# Altium PCB PCB1.PcbDoc (part 1 of 2)
Units mil, origin at the board's own origin, x right, y up, seen from the top; angles counter-clockwise.
Board outline 5350 x 4029.88 mil, 2 copper layers (Top Layer, Bottom Layer); 136 components, 72 nets, 358 pads, 1189 vias.
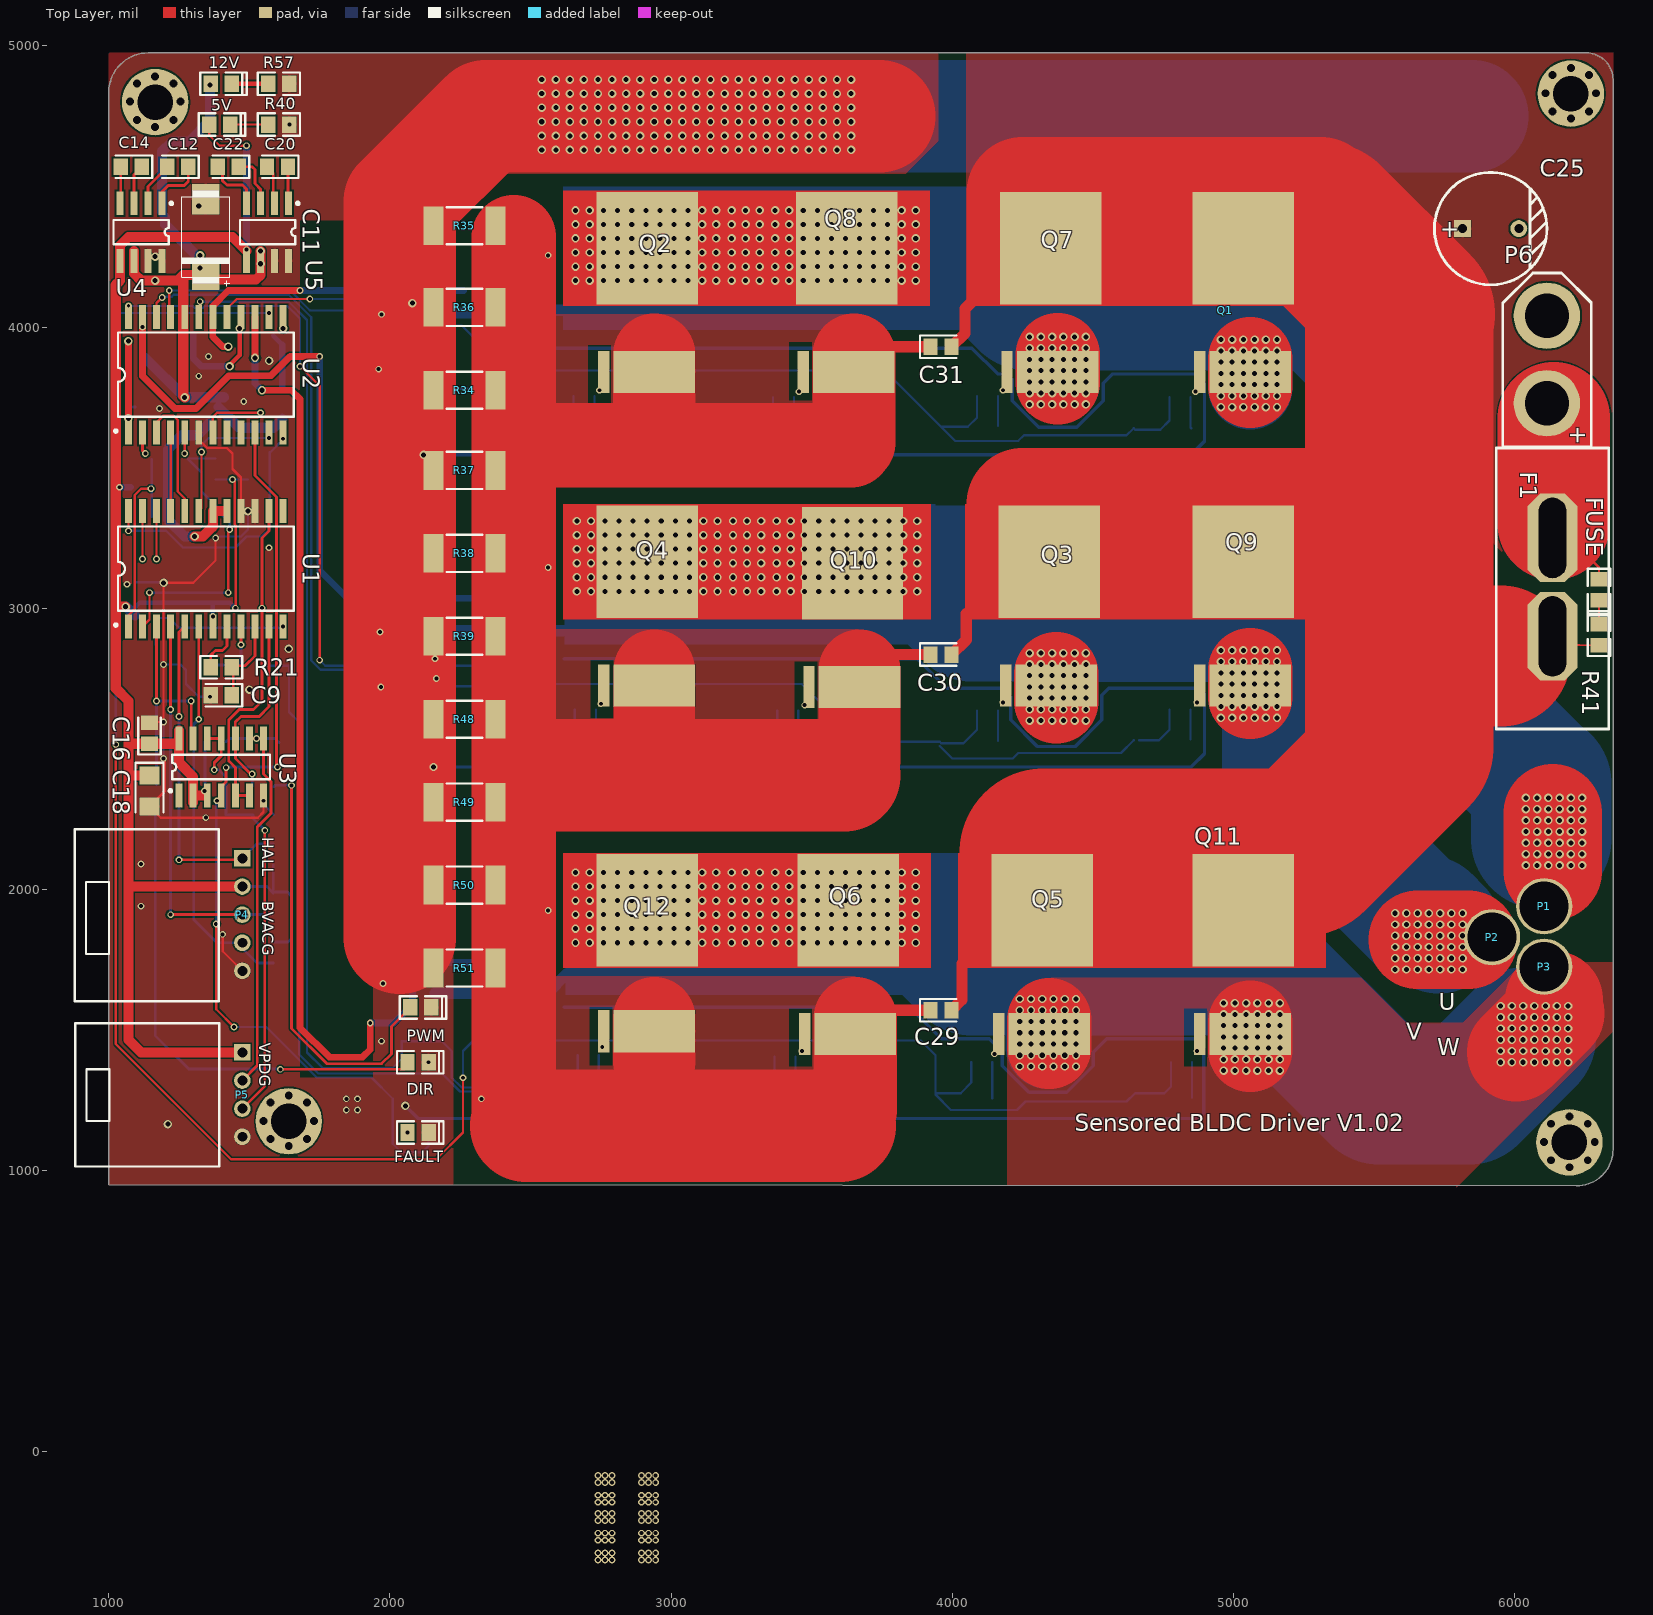
[diagram p0: Top Layer view]
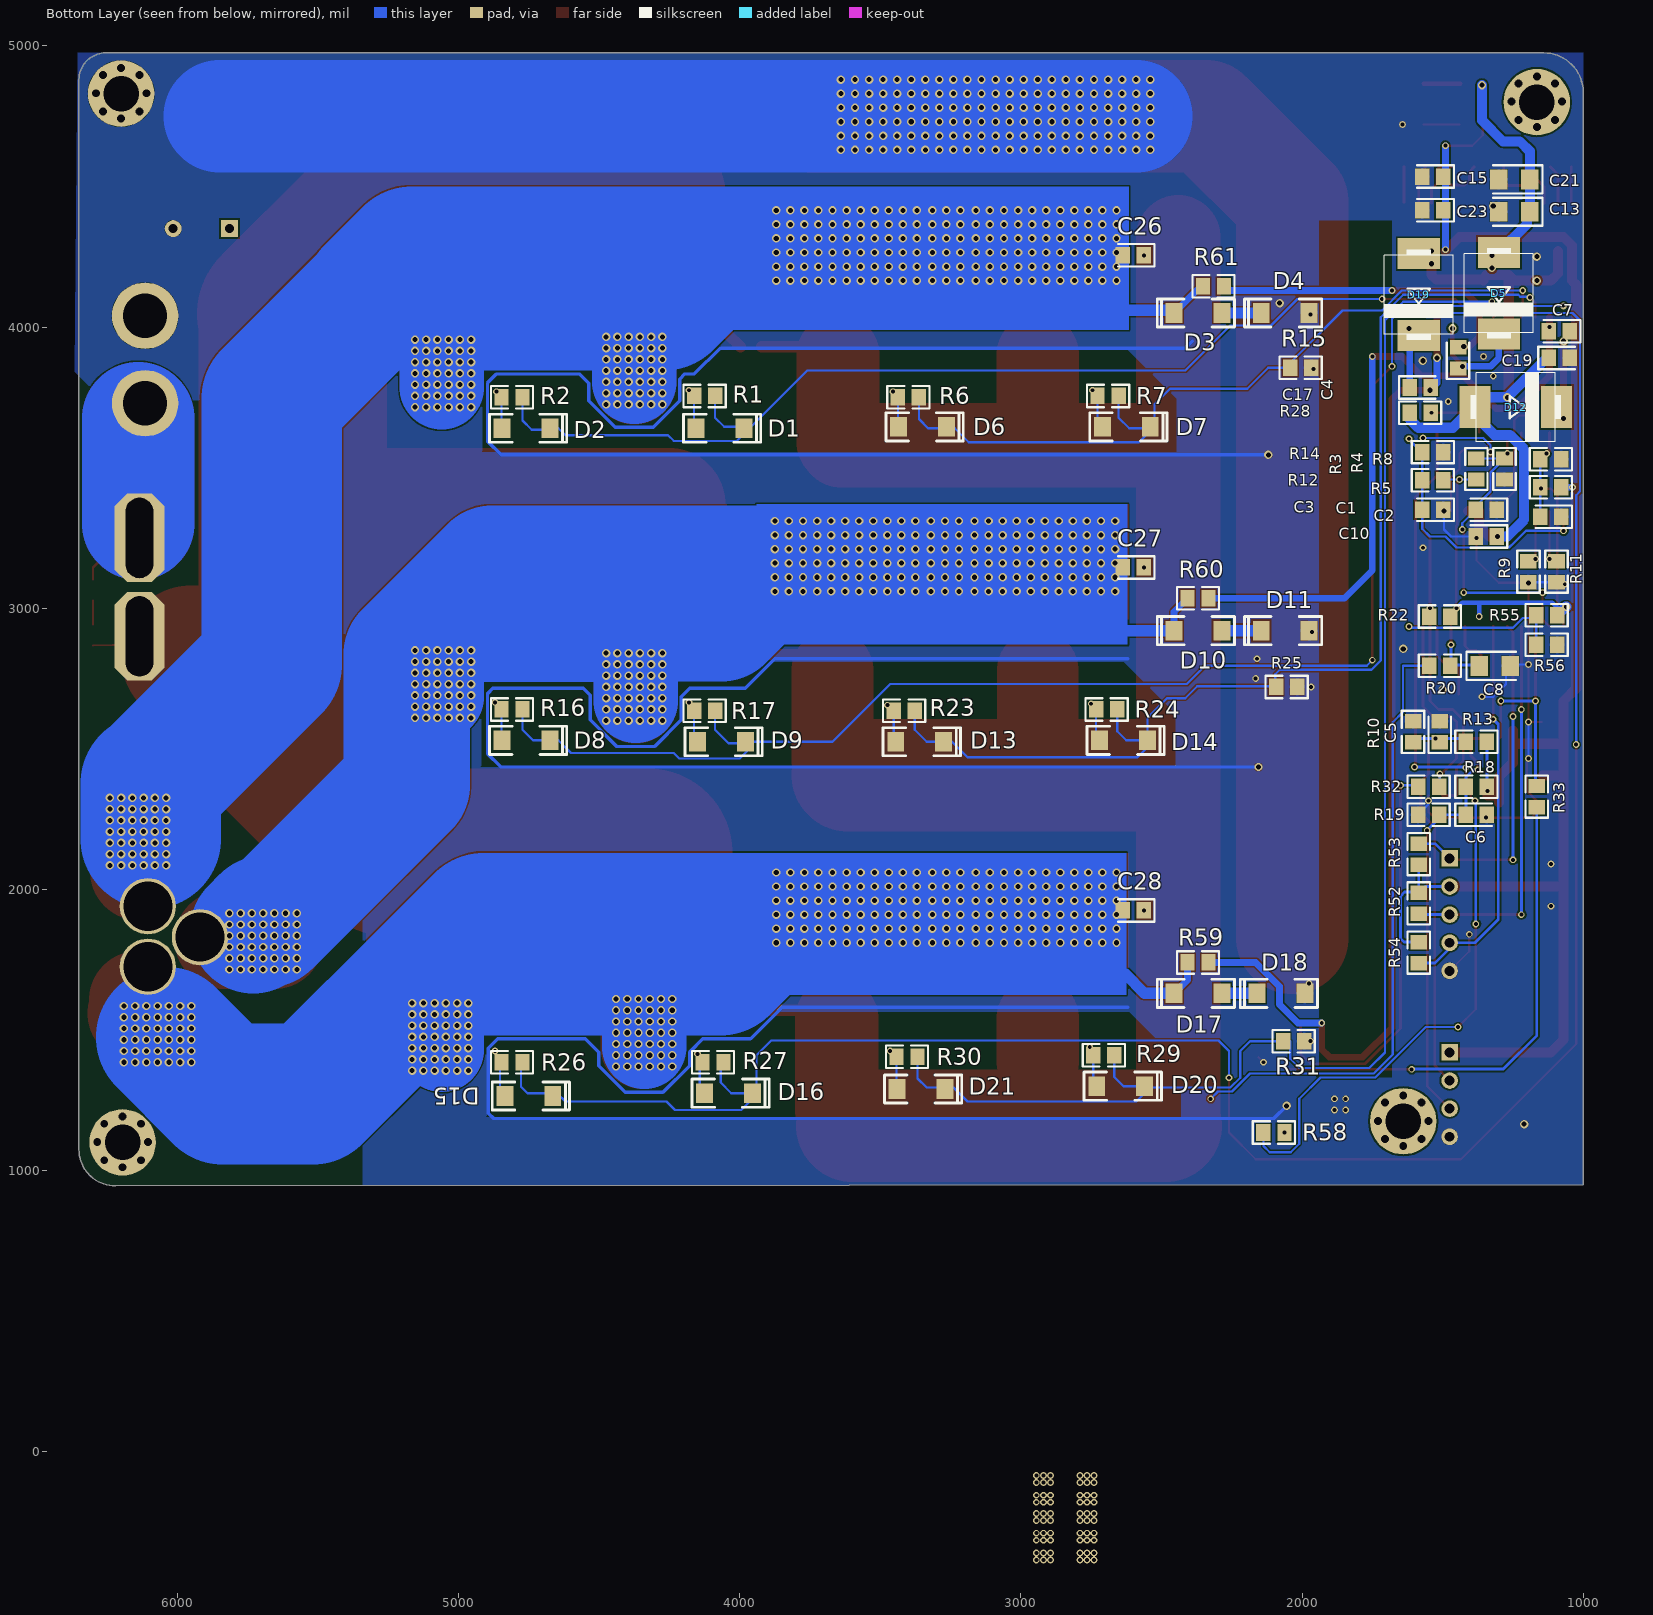
[diagram p1: Bottom Layer view, seen from below]

## Layer stack, top to bottom
Top Solder: solder mask 0.4, Solder Resist, Dk 3.5
Top Layer: signal copper 1.4
Dielectric 1: dielectric 12.6, FR-4, Dk 4.8
Bottom Layer: signal copper 1.4
Bottom Solder: solder mask 0.4, Solder Resist, Dk 3.5

## Board outline
1000,950 1000,4835 cw(c1140,4835) 1140,4975 6255,4975 cw(c6255,4880) 6350,4880 6350,1074.94 cw(c6220.18,1074.94) 6220.06,945.12

## Design rules (kind name [scope] priority, off if disabled: settings)
AssemblyTestPointUsage [All] p1 off:
AssemblyTestpoint [All] p1 off: testpointundercomponent=TRUE minsize=40 maxsize=100 preferedsize=60 minholesize=0 maxholesize=40 preferedholesize=32 testpointgrid=1 usegrid=TRUE gridtolerance=0.01 allowsidetop=TRUE allowsidebottom=TRUE
Clearance [All] p1: gap=6
ComponentClearance [All] p1 off: gap=10 collisioncheckmode=3 verticalgap=10 showdistances=FALSE
DiffPairsRouting [All] p1 off: maxlimit=10 minlimit=10 mostfreqgap=10 toplayer_minwidth=15 toplayer_maxwidth=15 toplayer_prefwidth=15 bottomlayer_minwidth=15 bottomlayer_maxwidth=15 bottomlayer_prefwidth=15 maxuncoupledlength=500
FabricationTestPointUsage [All] p1 off: valid=0 allowmultiple=FALSE
FabricationTestpoint [All] p1 off: side=3 testpointundercomponent=TRUE minsize=40 maxsize=100 preferedsize=60 minholesize=0 maxholesize=40 preferedholesize=32 testpointgrid=1 allowsidetop=TRUE allowsidebottom=TRUE usegrid=TRUE gridtolerance=0.01
FanoutControl Fanout_BGA [IsBGA] p1 off: bgadir=Out bgaviamode=Centered fanoutstyle=Auto fanoutdirection=Alternating viagrid=1 // Fanout_BGA (Default Rule)
FanoutControl Fanout_LCC [IsLCC] p2 off: bgadir=Out bgaviamode=Centered fanoutstyle=Auto fanoutdirection=Alternating viagrid=1 // Fanout_LCC (Default Rule)
FanoutControl Fanout_SOIC [IsSOIC] p3 off: bgadir=Out bgaviamode=Centered fanoutstyle=Auto fanoutdirection=Alternating viagrid=1 // Fanout_SOIC (Default Rule)
FanoutControl Fanout_Small [(CompPinCount < 5)] p4 off: bgadir=Out bgaviamode=Centered fanoutstyle=Auto fanoutdirection=OutThenIn viagrid=1 // Fanout_Small (Default Rule)
FanoutControl Fanout_Default [All] p5 off: bgadir=Out bgaviamode=Centered fanoutstyle=Auto fanoutdirection=Alternating viagrid=1 // Fanout_Default (Default Rule)
Height [All] p1 off: minheight=0 maxheight=1000 prefheight=500
HoleSize [All] p1: absolutevalues=TRUE maxlimit=300 minlimit=1 maxpercent=80.000 minpercent=20.000
HoleToHoleClearance [All] p1 off: gap=10 allowstackedmicrovias=TRUE
LayerPairs [All] p1 off: enforce=TRUE
MinimumSolderMaskSliver [All] p1 off: minsoldermaskwidth=10
NetAntennae [All] p1 off: netantennaetolerance=0
PasteMaskExpansion [All] p1 off: expansion=0
PlaneClearance [All] p1 off: clearance=20
PolygonConnect [All] p1 off: connectstyle=Relief reliefconductorwidth=10 reliefentries=4 polygonreliefangle="90 Angle" airgapwidth=10
RoutingCorners [All] p1 off: cornerstyle=45-Degree minsetback=100 maxsetback=100
RoutingLayers [All] p1 off: top layer_v5=TRUE bottom layer_v5=TRUE
RoutingPriority [All] p1 off: routingpriority=0
RoutingTopology [All] p1 off: topology=Shortest
RoutingVias [All] p1: holewidth=14 width=24 viastyle="Through Hole" minholewidth=12 minwidth=12 maxholewidth=50 maxwidth=50
SilkToBoardRegionClearance [All] p1 off:
SilkToSilkClearance [All] p1 off: silktosilkclearance=10
SilkToSolderMaskClearance [IsPad] p1 off: minsilkscreentomaskgap=10 clearancetoexposedcopper=TRUE
SolderMaskExpansion [All] p1 off: expansion=4
UnpouredPolygon [All] p1: allowunpoured=FALSE
Width [All] p1: maxlimit=50000 minlimit=8 preferedwidth=8
3 further rules are at their usual default settings.

## Components (designator, comment, footprint, x,y, rotation, side; value= is the part's Value field where it differs from the comment)
5V "VCC" D0805 1395,4720 r0 top (schematic designator D24)
12V "VCC_12V" D0805 1400,4865 r0 top
C1 "10nF" CC2012-0805 1345,3350 r0 bottom
C2 "10nF" CC2012-0805 1115,3325 r0 bottom
C3 "10nF" CC2012-0805 1535,3350 r0 bottom
C4 "4.7uF" CC2012-0805 1445,3890 r90 bottom
C5 "100nF" CC2012-0805 1510,2560 r90 bottom
C6 "100nF" CC2012-0805 1380,2265 r180 bottom
C7 "4.7uF" CC2012-0805 1085,3985 r0 bottom
C8 "10uF" CC3216-1206 1315,2795 r180 bottom
C9 "10nF" CC2012-0805 1400,2690 r180 top locked
C10 "100nF" CC2012-0805 1345,3255 r0 bottom
C11 "100uF" EIA7343 1345,4320 r270 top
C12 "220nF" CC2012-0805 1245,4570 r180 top locked
C13 "10uF" CC3216-1206 1245,4410 r0 bottom
C14 "220nF" CC2012-0805 1080,4570 r180 top locked
C15 "4.7uF" CC2012-0805 1535,4535 r0 bottom
C16 "100nF" CC2012-0805 1145,2555 r90 top locked
C17 "4.7uF" CC2012-0805 1580,3785 r180 bottom
C18 "10uF" CC3216-1206 1145,2350 r270 top locked
C19 "100nF" CC2012-0805 1085,3890 r180 bottom
C20 "220nF" CC2012-0805 1600,4570 r180 top locked
C21 "10uF" CC3216-1206 1245,4525 r0 bottom
C22 "220nF" CC2012-0805 1425,4570 r180 top locked
C23 "4.7uF" CC2012-0805 1535,4415 r0 bottom
C25 "470uF" CAP10x12 5915,4350 r0 top
C26 "100nF" CC2012-0805 2600,4255 r0 bottom
C27 "100nF" CC2012-0805 2600,3145 r0 bottom
C28 "100nF" CC2012-0805 2600,1925 r0 bottom
C29 "1uF" CC2012-0805 3960,1570 r0 top
C30 "1uF" CC2012-0805 3960,2835 r0 top
C31 "1uF" CC2012-0805 3960,3930 r0 top
D1 "1N4148" SOD-80 4070,3640 r180 bottom
D2 "1N4148" SOD-80 4760,3640 r180 bottom
D3 "1N4148" SOD-80 2370,4050 r0 bottom
D4 "1N4148" SOD-80 2060,4050 r0 bottom
D5 "SS84" SMC 1300,4135 r90 bottom
D6 "1N4148" SOD-80 3350,3645 r180 bottom
D7 "1N4148" SOD-80 2625,3645 r180 bottom
D8 "1N4148" SOD-80 4760,2530 r180 bottom
D9 "1N4148" SOD-80 4065,2525 r180 bottom
D10 "1N4148" SOD-80 2370,2920 r0 bottom
D11 "1N4148" SOD-80 2060,2920 r0 bottom
D12 "SS84" SMC 1255,3715 r0 bottom
D13 "1N4148" SOD-80 3360,2525 r180 bottom
D14 "1N4148" SOD-80 2635,2530 r180 bottom
D15 "1N4148" SOD-80 4750,1265 r180 bottom
D16 "1N4148" SOD-80 4040,1275 r180 bottom
D17 "1N4148" SOD-80 2370,1630 r0 bottom
D18 "1N4148" SOD-80 2075,1630 r0 bottom
D19 "SS84" SMC 1585,4130 r90 bottom
D20 "1N4148" SOD-80 2645,1300 r180 bottom
D21 "1N4148" SOD-80 3355,1290 r180 bottom
DIR "DIR" D0805 2100,1385 r0 top (schematic designator D23)
F1 "20A Fuse" "FUSE SOCKET" 6135,2645 r90 top
FAULT "LED" D0805 2100,1135 r0 top
FUSE "FUSE" D0805 6300,3065 r270 top
P1 "U" 2.5X4_WIRE_PAD#1 6105,1940 r0 top
P2 "V" 2.5X4_WIRE_PAD#1 5920,1830 r0 top
P3 "W" 2.5X4_WIRE_PAD#2 6095,1650 r0 top
P4 "HALL" LOCKEDHDR-5W 1475,1910 r270 top locked
P5 "SIG" LOCKEDHDR-4W 1475,1270 r270 top locked
P6 "PWR" xt60(m) 6115,4040 r270 top
PWM "PWM" D0805 2110,1580 r0 top (schematic designator D22)
Q1 "IRFS7530" "D2k 7 pin"#1 5035,4280 r90 top
Q2 "IRFS7530" "D2k 7 pin"#1 2915,4280 r90 top
Q3 "IRFS7530" "D2k 7 pin"#1 4345,3165 r90 top
Q4 "IRFS7530" "D2k 7 pin"#1 2915,3165 r90 top
Q5 "IRFS7530" "D2k 7 pin"#1 4320,1925 r90 top
Q6 "IRFS7530" "D2k 7 pin"#1 3630,1925 r90 top
Q7 "IRFS7530" "D2k 7 pin"#1 4350,4280 r90 top
Q8 "IRFS7530" "D2k 7 pin"#1 3625,4280 r90 top
Q9 "IRFS7530" "D2k 7 pin"#1 5035,3165 r90 top
Q10 "IRFS7530" "D2k 7 pin"#1 3645,3160 r90 top
Q11 "IRFS7530" "D2k 7 pin"#1 5035,1925 r90 top
Q12 "IRFS7530" "D2k 7 pin"#2 2915,1935 r90 top
R1 "33R" CR2012-0805 4125,3755 r0 bottom
R2 "33R" CR2012-0805 4810,3750 r0 bottom
R3 "330R" CR2012-0805 1380,3495 r270 bottom
R4 "4.7k" CR2012-0805 1280,3495 r270 bottom
R5 "330R" CR2012-0805 1115,3430 r180 bottom
R6 "33R" CR2012-0805 3400,3750 r0 bottom
R7 "33R" CR2012-0805 2690,3755 r0 bottom
R8 "4.7k" CR2012-0805 1115,3530 r180 bottom
R9 "0R" CR2012-0805 1195,3130 r270 bottom
R10 "10k" CR2012-0805 1605,2560 r90 bottom
R11 "0R" CR2012-0805 1095,3130 r270 bottom
R12 "330R" CR2012-0805 1535,3455 r180 bottom
R13 "1k" CR2012-0805 1380,2525 r180 bottom
R14 "4.7k" CR2012-0805 1535,3555 r180 bottom
R15 "4.7k" CR2012-0805 2005,3855 r0 bottom
R16 "33R" CR2012-0805 4810,2640 r0 bottom
R17 "33R" CR2012-0805 4125,2635 r0 bottom
R18 "1k" CR2012-0805 1380,2365 r180 bottom
R19 "10k" CR2012-0805 1550,2265 r0 bottom locked
R20 "1k" CR2012-0805 1510,2795 r180 bottom
R21 "4.7k" CR2012-0805 1400,2790 r0 top locked
R22 "10k" CR2012-0805 1510,2970 r180 bottom
R23 "33R" CR2012-0805 3415,2635 r0 bottom
R24 "33R" CR2012-0805 2695,2640 r0 bottom
R25 "4.7k" CR2012-0805 2055,2720 r0 bottom
R26 "33R" CR2012-0805 4810,1385 r0 bottom
R27 "33R" CR2012-0805 4095,1385 r0 bottom
R28 "10k" CR2012-0805 1580,3695 r0 bottom
R29 "33R" CR2012-0805 2705,1410 r0 bottom
R30 "33R" CR2012-0805 3405,1405 r0 bottom
R31 "4.7k" CR2012-0805 2030,1460 r0 bottom
R32 "330R" CR2012-0805 1550,2365 r180 bottom
R33 "330R" CR2012-0805 1165,2330 r90 bottom
R34 "10mR" CR6332-2512 2265,3775 r0 top
R35 "10mR" CR6332-2512 2265,4360 r0 top
R36 "10mR" CR6332-2512 2265,4070 r0 top
R37 "10mR" CR6332-2512 2265,3490 r0 top
R38 "10mR" CR6332-2512 2265,3195 r0 top
R39 "10mR" CR6332-2512 2265,2900 r0 top
R40 "330R" CR2012-0805 1605,4720 r180 top
R41 "4.7k" CR2012-0805 6300,2905 r90 top
R48 "10mR" CR6332-2512 2265,2605 r0 top
R49 "10mR" CR6332-2512 2265,2310 r0 top
R50 "10mR" CR6332-2512 2265,2015 r0 top
R51 "10mR" CR6332-2512 2265,1720 r0 top
R52 "1k" CR2012-0805 1585,1950 r90 bottom locked
R53 "1k" CR2012-0805 1585,2125 r270 bottom
R54 "1k" CR2012-0805 1585,1775 r90 bottom locked
R55 "1k" CR2012-0805 1130,2975 r180 bottom
R56 "1k" CR2012-0805 1130,2870 r180 bottom
R57 "4.7k" CR2012-0805 1605,4865 r180 top
R58 "330R" CR2012-0805 2100,1135 r0 bottom
R59 "33R" CR2012-0805 2370,1740 r0 bottom
R60 "33R" CR2012-0805 2370,3035 r0 bottom
R61 "33R" CR2012-0805 2315,4145 r0 bottom
U1 "MC33035" SOP-24 1345,3140 r0 top locked
U2 "HIP4086" SOP-24 1345,3830 r0 top locked
U3 "74HC02" SOP-14 1400,2435 r0 top locked
U4 "MAX662A" SOP-8 1190,4440 r180 top locked
U5 "MAX662A" SOP-8 1640,4440 r180 top locked

## Footprints (in the part's own frame and the unit in brackets; to place one, negate y for a bottom-side part, rotate by r counter-clockwise, add the part's x,y. Pads: shape width x height; smd on the part's side, far side on the other; paste and mask are expansions set on the pad)
2.5X4_WIRE_PAD#1 [mil]
  round 200 hole 175: 1(0,0)
2.5X4_WIRE_PAD#2 [mil]
  round 200 hole 175: 1(10,75)
CAP10x12 [mil]
  rect 60x60 hole 31.5: 1(-100,0)
  round 60 hole 31.5: 2(100,0)
  silkscreen extent -200,-200 200,200, body extent -198,-198 196,196, height 472
CC2012-0805 [mm] "Chip Capacitor; Body 2.0 x 1.2 mm (LxW typ)"
  rect 1.3x1.5 smd: 1(-0.95,0) 2(0.95,0)
  silkscreen extent -1.91,-1.02 1.4,1.02, body extent -0.99,-0.64 1.01,0.62, height 0.58
CC3216-1206 [mm] "Chip Capacitor; Body 3.2 x 1.6 mm (LxW typ)"
  rect 1.6x1.8 smd: 1(-1.4,0) 2(1.4,0)
  silkscreen extent -2.54,-1.27 1.93,1.27, body extent -1.6,-0.79 1.6,0.81, height 0.76
CR2012-0805 [mm] "Chip Resistor; Body 2.0 x 1.3 mm (LxW typ)"
  rect 1.3x1.5 smd: 1(-0.95,0) 2(0.95,0)
  silkscreen extent -1.91,-1.02 1.91,1.02, body extent -0.98,-0.62 1.02,0.63, height 0.58
CR6332-2512 [mm] "Chip Resistor; Body 6.3 x 3.2 mm (LxW typ)"
  rect 1.8x3.5 smd: 1(-2.8,0) 2(2.8,0)
  silkscreen extent -1.6,-1.68 1.6,1.68, body extent -3.2,-1.6 3.2,1.6, height 0.58
"D2k 7 pin"#1 [mil]
  rect 150x290 smd: 0(-440,-25)
  rect 150x40 smd: 1(-440,155)
  rect 400x360 smd: 2(0,0)
"D2k 7 pin"#2 [mil]
  rect 150x290 smd: 0(-440,-25)
  rect 150x40 smd: 1(-440,155)
  rect 400x360 smd: 2(-10,0)
D0805 [mm]
  rect 1.3x1.5 smd: 1(-0.95,0) 2(0.95,0)
  silkscreen extent -1.91,-1.02 2.3,1.02, body extent -0.98,-0.49 1.02,0.51, height 0.48
EIA7343 [mm]
  rect 2.75x2.5 smd: 1(3.429,0) 2(-3.429,0)
  silkscreen extent -4.22,-2.21 4.44,2.21, body extent -3.65,-2.15 3.65,2.15, height 2.8
"FUSE SOCKET" [mm]
  oct 8x4.5 hole 2.5 slot 7.25 at 0 deg: 1(6.477,0) 2(15.367,0)
  silkscreen extent -1.91,-5.08 23.49,5.08, body extent 3.04,-1.67 18.78,3.26, height 16.87
LOCKEDHDR-4W [mm] "5-pin header with lock"
  rect 1.5x1.5 hole 0.9: 1(-3.81,0)
  round 1.5 hole 0.9: 2(-1.27,0) 3(1.27,0) 4(3.81,0)
  silkscreen extent -6.45,-15.09 6.5,-2.08
LOCKEDHDR-5W [mm] "5-pin header with lock"
  rect 1.5x1.5 hole 0.9: 1(-5.08,0)
  round 1.5 hole 0.9: 2(-2.54,0) 3(0,0) 4(2.54,0) 5(5.08,0)
  silkscreen extent -7.72,-15.14 7.82,-2.13
SMC [mm]
  rect 2.8x3.8 smd: 1(3.319,0) 2(-4.081,0)
  silkscreen extent -4.47,-3.11 3.71,3.1
SOD-80 [mil]
  rect 60x70 smd: 1(-85,0) 2(85,0)
  silkscreen extent -130,-50 145,50, body extent -69,-29 69,30, height 60
SOP-8 [mil]
  rect 25x85 smd: 1(0,0) 2(50,0) 3(100,0) 4(150,0) 5(150,204.72) 6(100,204.72) 7(50,204.72) 8(0,204.72)
  silkscreen extent -37,-5 173,146, body extent -22,-13 171,223, height 67
SOP-14 [mil]
  rect 24.5x85 smd: 1(-149.83,-100.89) 2(-99.83,-100.89) 3(-49.83,-100.89) 4(0.17,-100.89) 5(50.17,-100.89) 6(100.17,-100.89) 7(150.17,-100.89) 8(150.17,101.74) 9(100.17,101.74) 10(50.17,101.74) 11(0.17,101.74) 12(-49.83,101.74) 13(-99.83,101.74) 14(-149.83,101.74)
  silkscreen extent -186,-90 173,43, body extent -170,-123 169,123, height 61
SOP-24 [mil] "Plastic Small Outline; 24 Leads; Body Width 7.5 mm"
  rect 24.5x85 smd: 1(-275,-205) 2(-225,-205) 3(-175,-205) 4(-125,-205) 5(-75,-205) 6(-25,-205) 7(25,-205) 8(75,-205) 9(125,-205) 10(175,-205) 11(225,-205) 12(275,-205) 13(275,205) 14(225,205) 15(175,205) 16(125,205) 17(75,205) 18(25,205) 19(-25,205) 20(-75,205) 21(-125,205) 22(-175,205) 23(-225,205) 24(-275,205)
  silkscreen extent -325,-205 312,150
xt60(m) [mm]
  round 6 hole 4: 1(7.9,0) 2(0,0)
  silkscreen extent -3.85,-4 11.85,4, body extent -3.92,-4.03 11.82,4.1, height 15.88

## Part data
5V 12V DIR FUSE PWM: library part LED, "Typical RED GaAs LED"
C1 C2 C3 C4 C5 C6 C7 C8 C9 C10 C12 C13 C14 C15 C16 C17 C18 C19 C20 C21 C22 C23 C26 C27 C28 C29 C30 C31: library part "Cap Semi", "Capacitor (Semiconductor SIM Model)"
C11: library part "Cap Pol SMD", "Polarized Capacitor (Axial)"
C25: library part "Cap Pol DIP", "Polarized Capacitor (Radial)"
D1 D2 D3 D4 D6 D7 D8 D9 D10 D11 D13 D14 D15 D16 D17 D18 D20 D21: library part "D General", "General Purpose Diode"
D5 D12 D19: library part "D Schottky", "Schottky Diode"
F1: library part Fuse, "Fuse"
FAULT: "Typical RED GaAs LED"
P1 P2 P3: library part Socket, "Socket"
P4: library part "Header 5", "Header, 5-Pin"
P5: library part "Header 4", "Header, 4-Pin"
P6: library part "Header 2", "Header, 2-Pin"
Q1 Q2 Q3 Q4 Q5 Q6 Q7 Q8 Q9 Q10 Q11 Q12: library part "D2k 7"
R1 R2 R3 R4 R5 R6 R7 R8 R9 R10 R11 R12 R13 R14 R15 R16 R17 R18 R19 R20 R21 R22 R23 R24 R25 R26 R27 R28 R29 R30 R31 R32 R33 R34 R35 R36 R37 R38 R39 R40 R41 R48 R49 R50 R51 R52 R53 R54 R55 R56 R57 R58 R59 R60 R61: library part "Res Semi", "Semiconductor Resistor"
U1: "80V/2.5A Peak, High Frequency Full / Bridge FET Driver"
U2: "80V, 500mA, 3-Phase MOSFET Driver80V, 500mA, 3-Phase MOSFET Driver"
U3: "Quadruple 2-Input Positive-NOR Gate"
U4 U5: "5V to 12V Charge Pump"

## Free pads (board coordinates)
  round 236.22 hole 125.89: 0(1165,4800) 0(1640,1175) 0(6195,1100) 0(6200,4830)

## Via types
v1: diameter 30, hole 18, Top Layer to Bottom Layer, 995 vias
v2: diameter 24, hole 14, Top Layer to Bottom Layer, 161 vias
v3: diameter 45, hole 28, Top Layer to Bottom Layer, 32 vias
v4: diameter 24, hole 12, Top Layer to Bottom Layer, 1 vias

## Nets (pads, with @x,y where several pads share a name; then routed paths per layer and width w, separated by ;. In a path a pad name is that pad's centre, name@x,y a point inside that pad or via, vN(x,y) a via of type N, cw(c..) or ccw(c..) an arc to the next point about the centre after c; other vN are vias at no path point)
AHI: C1.2 R3.1 R4.1 U1.2 U2.5 | length 1107.3
  Top Layer w8: U1.2@1120,2935 1145,2960 v2(1145,3055) ; v2(1270,3550) U2.5@1270,3625 ; v2(1425,3055) v2@1425,3275
  Bottom Layer w8: v2(1145,3055) v2(1425,3055) ; R3.1@1380,3532.4 R4.1@1280,3532.4 1330,3482.4 1330,3415 C1.2@1382.4,3362.6 ; C1.2@1382.4,3350 1430,3302.4 v2(1430,3280)
ALI: U1.21 U2.4 | length 280
  Top Layer w8: U1.21@1220,3345 U2.4@1220,3625
BHI: C2.2 R5.1 R8.1 U1.1 U2.2 | length 828
  Top Layer w8: U1.1@1070,2935 1070,2975 1070.36,2975 1092.25,2996.89 1092.25,3402.25 1115,3425 v2(1150,3425)
  Top Layer w10: U2.2@1120,3625 1120,3560 v2(1130,3550)
  Bottom Layer w8: C2.2@1152.4,3325 R5.1@1152.4,3430 R8.1@1152.4,3530
BLI: U1.20 U2.3 | length 426.3
  Top Layer w8: U2.3@1170,3660 1195,3685 1228.89,3685 1245,3668.89 1245,3415 1270,3390 U1.20@1270,3345
BRAKE: R11.1 U1.23 | length 170
  Top Layer w8: v2(1120,3175) U1.23@1120,3345
CHI: C3.2 R12.1 R14.1 U1.24 U2.12 | length 963.5
  Top Layer w8: v2(1070,3275) U1.24@1070,3345
  Bottom Layer w8: v2(1070,3275) 1203.89,3275 1245.89,3233 1246.54,3233 1264.07,3215.47 1450.27,3215.47 1489.82,3255.02 1545.02,3255.02 1572.4,3282.4 R12.1@1572.4,3455 R14.1@1572.4,3555 ; R14.1@1575,3555 1620,3600 v2(1620,3602.5)
CLI: U1.19 U2.11 | length 475.1
  Top Layer w8: U1.19@1330,3355 v2(1330,3555)
  Bottom Layer w8: v2(1330,3555) 1330,3579.61 1355.39,3605 v2(1570,3605)
D\I\R\: C6.1 P5.3 R18.1 R19.1 U3.11 U3.12 | length 1550.1
  Top Layer w10: U3.12@1350.17,2536.74 U3.11@1400.17,2536.74 1400.17,2475.17 1375,2450 v2(1375,2425) ; P5.3@1475,1220 1555,1300 v2(1555,2210)
  Bottom Layer w10: v2(1375,2425) 1392.47,2425 1417.4,2400.07 C6.1@1417.4,2265 1511.26,2265 1512.6,2263.66 1512.6,2252.4 v2(1555,2210)
DIR: R33.2 U1.3 U3.13 | length 821.8
  Top Layer w10: v2(1170,2670) U1.3@1170,2935 ; v2(1293,2670) 1293,2543.92 U3.13@1300.17,2536.74
  Bottom Layer w10: R33.2@1170,2372.4 v2(1170,2670) v2(1293,2670)
ERRINV: R55.1 R56.1 U1.12 | length 557.9
  Bottom Layer w8: R56.1@1167.4,2870 1167.4,2955 1177.4,2965 1215,2965 1249.53,2930.47 1615.47,2930.47 v2(1620,2935)
FAULT: R22.1 U1.14 U3.5 U3.6 | length 1159.7
  Top Layer w10: U3.6@1500.17,2334.11 U3.5@1450.17,2334.11 1450.17,2432.65 1426.92,2455.9 1426.92,2603.08 1463.85,2640 1515,2640 1545,2670 1545,3250 1570,3275 U1.14@1570,3345
  other v2: 1545,3000
FAULT_LED: R58.2 U2.10 U3.4 | length 3372.1
  Top Layer w8: v2(1381.81,1876.81) 1381.81,1573.19 v2(1445,1510)
  Top Layer w10: U3.4@1400.17,2334.11 1400.17,2364.83 1417.42,2382.08 v2(1417.42,2432.58) ; U2.10@1520,3625 1520,3471.75 1596.75,3395 1596.75,2438.25 v2(1600,2435)
  Bottom Layer w8: v2(1381.81,1876.81) 1381.81,2311.81 v2(1385,2315) ; v2(1445,1510) 1560.2,1510 1739.2,1331 1934,1331 2010,1255 2010,1095 2040,1065 2115,1065 2137.4,1087.4 R58.2@2137.4,1135
  Bottom Layer w10: v2(1417.42,2432.58) 1419.85,2435 v2(1600,2435)
GND: C1.1 C2.1 C3.1 C5.2 C6.2 C8.2 C9.2 C10.2 C11.2 C13.2 C15.2 C16.2 C18.2 C19.2 C21.2 C23.2 C25.2 D4.1 D11.1 D18.1 DIR.2 FAULT.2 P4.5 P5.4 P6.2 pad.0@6200,4830 PWM.2 R4.2 R8.2 R9.2 R10.2 R11.2 R14.2 R15.1 R19.2 R25.1 R31.1 R34.1 R35.1 R36.1 R37.1 R38.1 R39.1 R40.1 R48.1 R49.1 R50.1 R51.1 R56.2 R57.1 U1.15 U1.16 U2.6 U3.7 U4.7 U4.8 U5.7 U5.8 | length 27755.7
  Top Layer w8: C16.2@1147.6,2595 v2(1195,2595) v2(1195,2800) v1(1195,3090) 1300,3090 1380,3170 v2(1380,3250) ; v2@1200,2465 1200,2349.88 C18.2@1145,2294.88 1184.88,2255 v2(1345,2255) 1530,2255 1550.17,2275.17 U3.7@1550.17,2334.11 ; U2.6@1320,3625 1320,3600 1350,3570 1420,3570 1440,3550 1440,3495 1470,3465 U1.16@1470,3345 ; v2(1405,1840) 1405,1780 P4.5@1475,1710 ; 2005,1827.36 2122.36,1710 R51.1@2155,1710 ; v2(2137.4,1385) DIR.2@2155,1402.6
  Top Layer w400: 2035,1827.36 2035,4445 2340,4750 3740,4750
  Bottom Layer w8: R11.2@1095,3092.6 R9.2@1195,3092.6 ; v2(1195,2465) v2(1195,2595) ; v2(1195,2800) 1254.88,2800 C8.2@1259.88,2795 1275,2779.88 1275,2730 1320,2685 v2(1360,2685) ; C10.2@1382.4,3255 1470,3255 1495,3280 C3.1@1495,3347.4 ; v2(1550,2315) 1550,2302.4 R19.2@1587.4,2265
  Bottom Layer w12: v1(2055,1230) 2100,1185 4875,1185 4894,1204 4894,1434.94 4860.94,1468 4550,1468 4502,1420 4502,1372.9 4407.1,1278 4272.9,1278 4178,1372.9 4178,1421.49 4131.49,1468 3961.48,1468 3849.48,1580 2620,1580 ; v1(2120,3545) 4848.97,3545 4897,3593.03 4897,3801 4865,3833 4570,3833 4537,3800 4537,3737.9 4442.1,3643 4307.9,3643 4213,3737.9 4213,3815 4195,3833 4161.48,3833 4069.48,3925 2415,3925 2390,3950 ; v1(2155,2435) 4850,2435 4850,2436.03 4897,2483.03 4897,2696 4878,2715 4557,2715 4532,2690 4532,2602.9 4437.1,2508 4302.9,2508 4208,2602.9 4208,2685 4178,2715 3979.83,2715 3874.83,2820 2620,2820
  Bottom Layer w400: 2590,4750 5850,4750
  other v1: 1210,1165 1500,2710 1640,2855 1495,3345 1570,3880 2080,4085 1165,4250 1320,4430 2540,4630 2590,4630 2640,4630 2690,4630 2740,4630 2790,4630 2840,4630 2890,4630 2940,4630 2990,4630 3040,4630 3090,4630 3140,4630 3190,4630 3240,4630 3290,4630 3340,4630 3390,4630 3440,4630 3490,4630 3540,4630 3590,4630 3640,4630 2540,4680 2590,4680 2640,4680 2690,4680 2740,4680 2790,4680 2840,4680 2890,4680 2940,4680 2990,4680 3040,4680 3090,4680 3140,4680 3190,4680 3240,4680 3290,4680 3340,4680 3390,4680 3440,4680 3490,4680 3540,4680 3590,4680 3640,4680 2540,4730 2590,4730 2640,4730 2690,4730 2740,4730 2790,4730 2840,4730 2890,4730 2940,4730 2990,4730 3040,4730 3090,4730 3140,4730 3190,4730 3240,4730 3290,4730 3340,4730 3390,4730 3440,4730 3490,4730 3540,4730 3590,4730 3640,4730 2540,4780 2590,4780 2640,4780 2690,4780 2740,4780 2790,4780 2840,4780 2890,4780 2940,4780 2990,4780 3040,4780 3090,4780 3140,4780 3190,4780 3240,4780 3290,4780 3340,4780 3390,4780 3440,4780 3490,4780 3540,4780 3590,4780 3640,4780 2540,4830 2590,4830 2640,4830 2690,4830 2740,4830 2790,4830 2840,4830 2890,4830 2940,4830 2990,4830 3040,4830 3090,4830 3140,4830 3190,4830 3240,4830 3290,4830 3340,4830 3390,4830 3440,4830 3490,4830 3540,4830 3590,4830 3640,4830 2540,4880 2590,4880 2640,4880 2690,4880 2740,4880 2790,4880 2840,4880 2890,4880 2940,4880 2990,4880 3040,4880 3090,4880 3140,4880 3190,4880 3240,4880 3290,4880 3340,4880 3390,4880 3440,4880 3490,4880 3540,4880 3590,4880 3640,4880
  other v2: 1845,1215 1885,1215 1845,1255 1885,1255 1970,1460 1975,1665 1115,1940 1115,2090 1967.6,2720 2165,2750 2160,2820 1965,2915 1065,3085 1570,3215 1180,3710 1480,3735 1320,3825 1960,3850 1355,3895 1970,4045 1642.4,4720
  other v3: 6200,4741.5 6135,4766.5 6265,4766.5 6110,4831.5 6290,4831.5 6135,4896.5 6265,4896.5 6200,4921.5
HALLA: P4.3 R52.1 U1.4 | length 1387.4
  Top Layer w10: v2(1220,1910) P4.3@1475,1910 ; v2(1220,2640) U1.4@1220,2935
  Bottom Layer w10: v2(1220,1910) v2(1220,2640) ; P4.3@1475,1910 R52.1@1582.4,1910
HALLB: P4.1 R53.1 U1.5 | length 1197.1
  Top Layer w10: v2(1250,2105) 1470,2105 P4.1@1475,2110 ; v2(1250,2615) 1250,2915 U1.5@1270,2935
  Bottom Layer w10: v2(1250,2105) 1250,2135 v2(1250,2615) ; P4.1@1475,2110 1527.4,2162.4 R53.1@1585,2162.4
HALLC: P4.4 R54.1 U1.6 | length 1376.2
  Top Layer w10: v2(1320,2605) U1.6@1320,2935
  Bottom Layer w10: 1311.26,2596.26 1302.01,2587.01 1302.01,1892.99 1385,1810 P4.4@1475,1810 ; P4.4@1475,1790 1527.4,1737.6 R54.1@1585,1737.6
ISENS: C26.1 C27.1 C28.1 C29.1 C30.1 C31.1 Q2.0 Q4.0 Q6.0 Q8.0 Q10.0 Q12.0 R20.1 R34.2 R35.2 R36.2 R37.2 R38.2 R39.2 R48.2 R49.2 R50.2 R51.2 | length 11272.7
  Top Layer w10: 2335,1365 2425,1275
  Top Layer w40: Q6.0@3655,1485 3740,1570 C29.1@3922.6,1570 ; 3680,3930 C31.1@3922.6,3930 ; 3725,2835 C30.1@3922.6,2835
  Top Layer w180: 3645,3580 3695,3630 3695,3740
  Top Layer w290: 2940,2580 Q4.0@2940,2780 ; 3670,2460 Q10.0@3670,2720 Q10.0@3670,2780
  Top Layer w295: 2940,1390 Q12.0@2940,1540 ; 2940,3735 Q2.0@2940,3900 ; 3650,3590 Q8.0@3650,3840 Q8.0@3650,3900
  Top Layer w296: 3600,1160 3655,1215 Q6.0@3655,1485 Q6.0@3655,1540
  Top Layer w300: 2440,1215 2440,4320 ; 2515,3580 3640,3580
  Top Layer w400: 2485,1160 3600,1160 ; 2490,2405 3615,2405
  Bottom Layer w8: R20.1@1547.4,2795 1641,2795 1641,2630.66 1677,2594.66 1677,1413 1745,1345 2185.2,1345 2249.2,1281 2299,1281 v2(2325,1255)
  other v2: 2562.6,1925 2562.6,3145 2562.6,4255
MU: C26.2 D3.2 P1.1 Q1.0 Q2.2 Q7.0 Q8.2 R61.2 | length 5910.3
  Top Layer w300: Q7.0@4375,3804 Q7.0@4375,3840 Q7.0@4375,3900 ; Q1.0@5060,3790 Q1.0@5060,3840 Q1.0@5060,3885
  Top Layer w350: 6135,2065 6135,2270
  Bottom Layer w24: R61.2@2375,4130 D3.2@2455,4050
  Bottom Layer w40: D3.2@2455,4050 2465,4060 2760,4060
  Bottom Layer w300: 4375,3805 4375,3900 ; 5060,3785 5060,3885
  Bottom Layer w500: 4135,4230 4270,4095 5295,4095 ; 4135,4250 5165,4250 5300,4115 ; 5295,4115 5665,3745 ; 5665,3725 5665,2800 6080,2385 ; 6095,2180 6095,2375
  Bottom Layer w510: 3905,4245 4135,4245
  other v1: 6040,2085 6080,2085 6120,2085 6160,2085 6200,2085 6240,2085 6040,2125 6080,2125 6120,2125 6160,2125 6200,2125 6240,2125 6040,2165 6080,2165 6120,2165 6160,2165 6200,2165 6240,2165 6040,2205 6080,2205 6120,2205 6160,2205 6200,2205 6240,2205 6040,2245 6080,2245 6120,2245 6160,2245 6200,2245 6240,2245 6040,2285 6080,2285 6120,2285 6160,2285 6200,2285 6240,2285 6040,2325 6080,2325 6120,2325 6160,2325 6200,2325 6240,2325 4955,3715 4995,3715 5035,3715 5075,3715 5115,3715 5155,3715 4275,3725 4315,3725 4355,3725 4395,3725 4435,3725 4475,3725 4955,3755 4995,3755 5035,3755 5075,3755 5115,3755 5155,3755 4275,3765 4315,3765 4355,3765 4395,3765 4435,3765 4475,3765 4955,3795 4995,3795 5035,3795 5075,3795 5115,3795 5155,3795 4275,3805 4315,3805 4355,3805 4395,3805 4435,3805 4475,3805 4955,3835 4995,3835 5035,3835 5075,3835 5115,3835 5155,3835 4275,3845 4315,3845 4355,3845 4395,3845 4435,3845 4475,3845 4955,3875 4995,3875 5035,3875 5075,3875 5115,3875 5155,3875 4275,3885 4315,3885 4355,3885 4395,3885 4435,3885 4475,3885 4955,3915 4995,3915 5035,3915 5075,3915 5115,3915 5155,3915 4275,3925 4315,3925 4355,3925 4395,3925 4435,3925 4475,3925 4955,3955 4995,3955 5035,3955 5075,3955 5115,3955 5155,3955 4275,3965 4315,3965 4355,3965 4395,3965 4435,3965 4475,3965 2660,4165 2710,4165 2760,4165 2810,4165 2860,4165 2910,4165 2960,4165 3010,4165 3060,4165 3110,4165 3160,4165 3215,4165 3265,4165 3315,4165 3370,4165 3420,4165 3470,4165 3520,4165 3570,4165 3620,4165 3670,4165 3720,4165 3770,4165 3820,4165 3870,4165 2660,4215 2710,4215 2760,4215 2810,4215 2860,4215 2910,4215 2960,4215 3010,4215 3060,4215 3110,4215 3160,4215 3215,4215 3265,4215 3315,4215 3370,4215 3420,4215 3470,4215 3520,4215 3570,4215 3620,4215 3670,4215 3720,4215 3770,4215 3820,4215 3870,4215 2660,4265 2710,4265 2760,4265 2810,4265 2860,4265 2910,4265 2960,4265 3010,4265 3060,4265 3110,4265 3160,4265 3215,4265 3265,4265 3315,4265 3370,4265 3420,4265 3470,4265 3520,4265 3570,4265 3620,4265 3670,4265 3720,4265 3770,4265 3820,4265 3870,4265 2660,4315 2710,4315 2760,4315 2810,4315 2860,4315 2910,4315 2960,4315 3010,4315 3060,4315 3110,4315 3160,4315 3215,4315 3265,4315 3315,4315 3370,4315 3420,4315 3470,4315 3520,4315 3570,4315 3620,4315 3670,4315 3720,4315 3770,4315 3820,4315 3870,4315 2660,4365 2710,4365 2760,4365 2810,4365 2860,4365 2910,4365 2960,4365 3010,4365 3060,4365 3110,4365 3160,4365 3215,4365 3265,4365 3315,4365 3370,4365 3420,4365 3470,4365 3520,4365 3570,4365 3620,4365 3670,4365 3720,4365 3770,4365 3820,4365 3870,4365 2660,4415 2710,4415 2760,4415 2810,4415 2860,4415 2910,4415 2960,4415 3010,4415 3060,4415 3110,4415 3160,4415 3215,4415 3265,4415 3315,4415 3370,4415 3420,4415 3470,4415 3520,4415 3570,4415 3620,4415 3670,4415 3720,4415 3770,4415 3820,4415 3870,4415